# EAGLE board breakout (EAGLE 7.2.0)
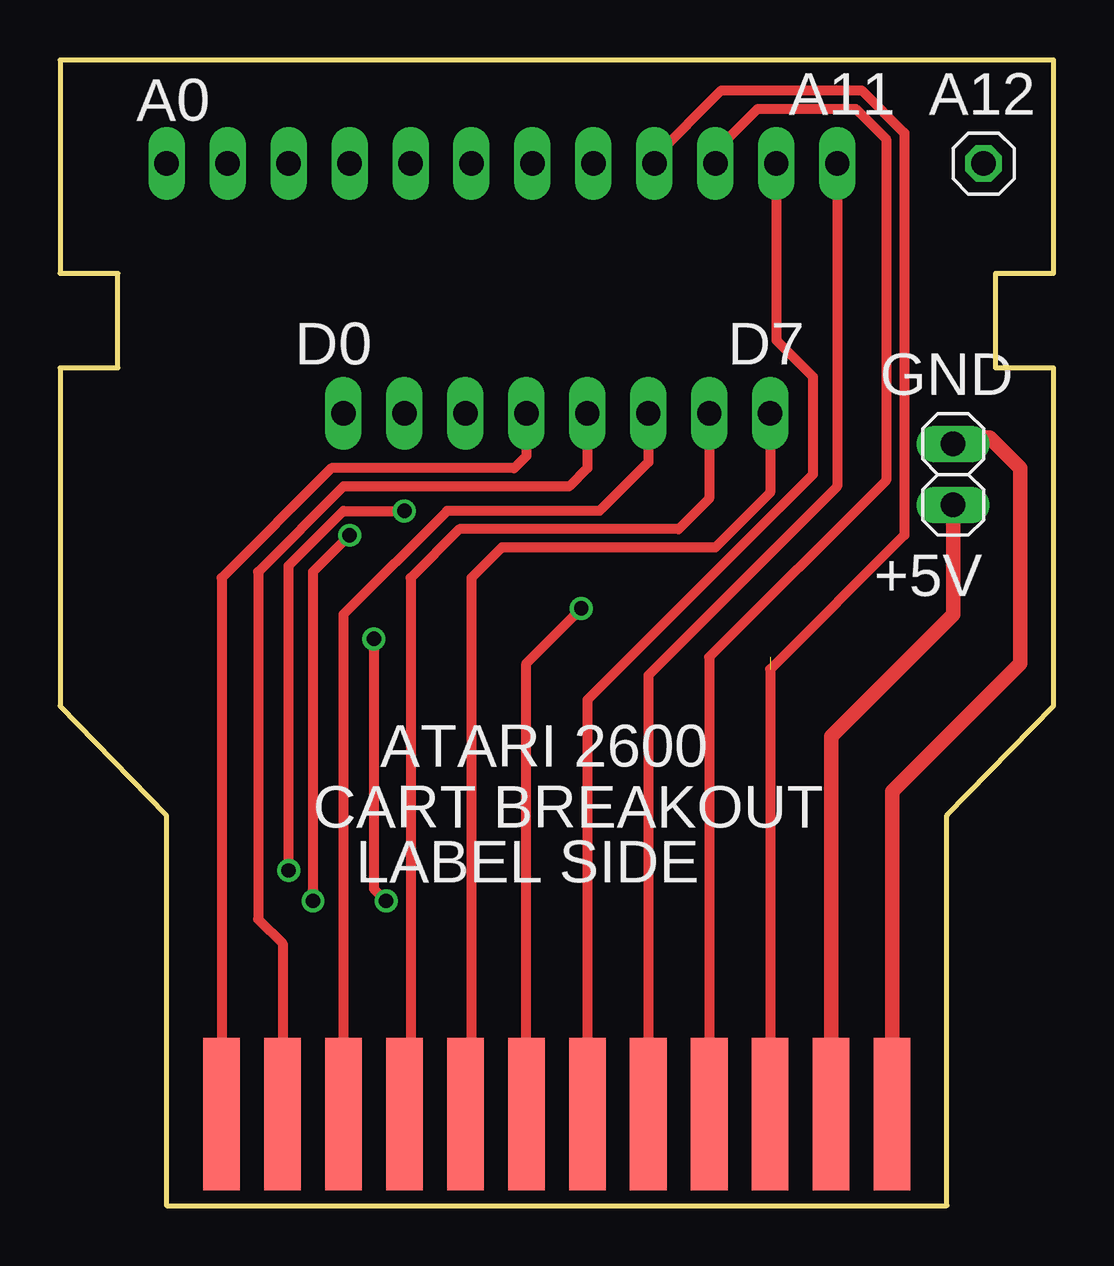
[diagram p0: board, top side]
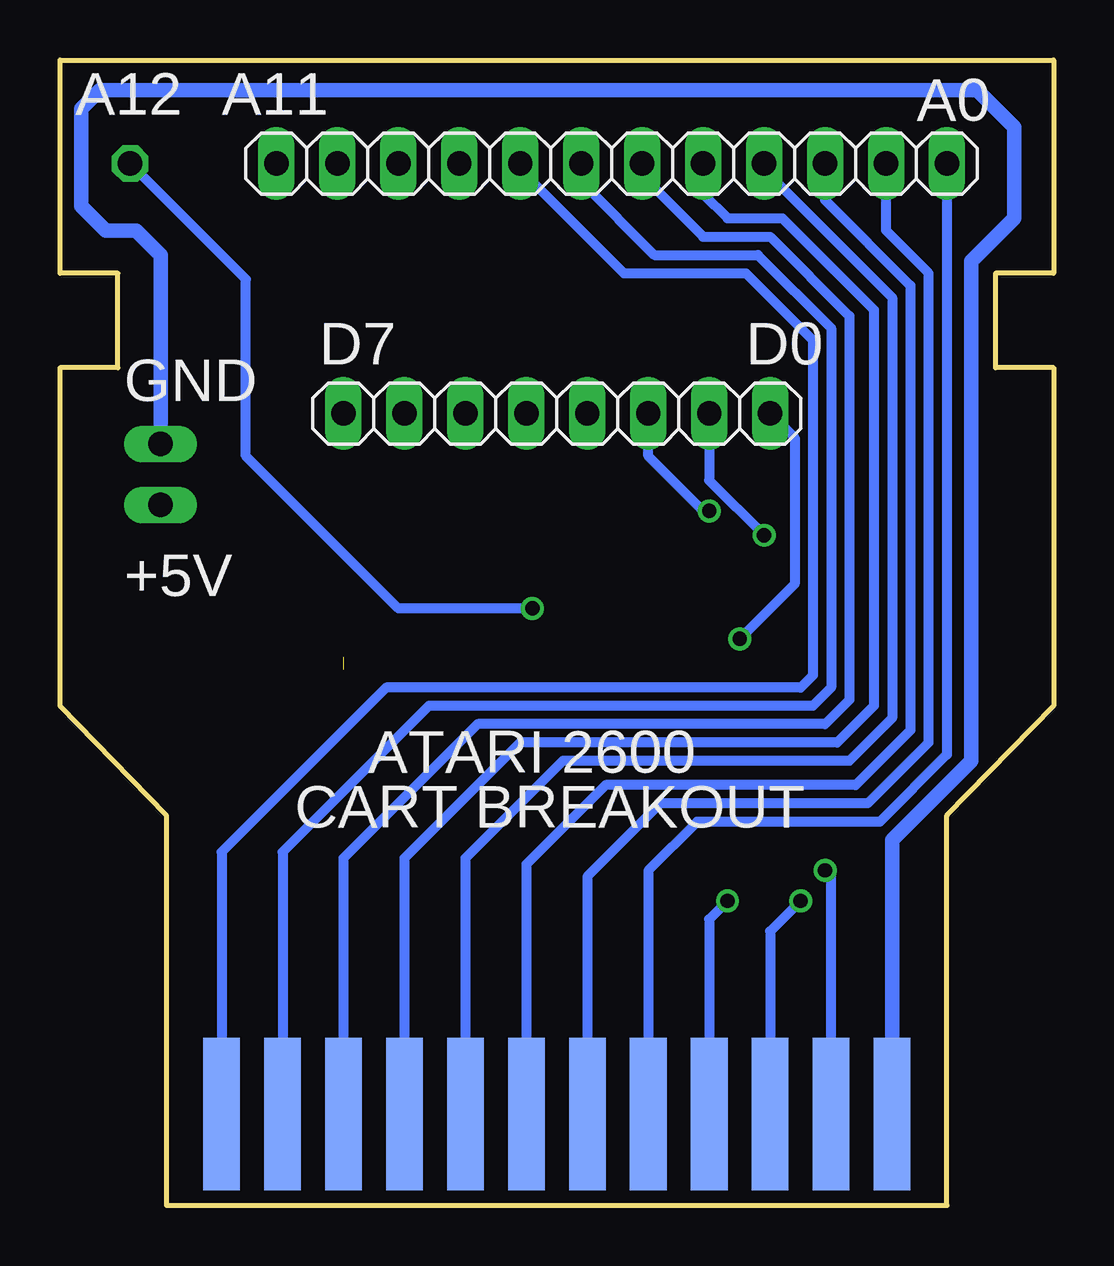
[diagram p1: board, bottom side, seen from below]

Size 41.4 x 47.75 mm. Coordinates in mm from the lower left corner, seen from the top.
Copper layers (1*16): Top 0.0356mm / dielectric 1.5011mm / Bottom 0.0356mm
Design rules "OSHPark2layer": minimum track width 6mil, minimum drill 13mil, track to track 6mil, track to pad 6mil, pad to pad 6mil, via to via 6mil, smd to smd 6mil, copper to edge 15mil, drill to drill 6mil, minimum pad ring 7mil, minimum via ring 7mil, stop-mask expansion 3mil, vias tented up to drill 0mil, thermal gap 10mil

## Footprints (pad centres in the part's own frame; a part is rotated, then mirrored left to right if it is on the bottom)
2600SMALL = smd 6.35 x 1.524: 1 3.81,13.97; 2 3.81,11.43; 3 3.81,8.89; 4 3.81,6.35; 5 3.81,3.81; 6 3.81,1.27; 7 3.81,-1.27; 8 3.81,-3.81; 9 3.81,-6.35; 10 3.81,-8.89; 11 3.81,-11.43; 12 3.81,-13.97 | smd 6.35 x 1.524 bottom: 13 3.81,-13.97; 14 3.81,-11.43; 15 3.81,-8.89; 16 3.81,-6.35; 17 3.81,-3.81; 18 3.81,-1.27; 19 3.81,1.27; 20 3.81,3.81; 21 3.81,6.35; 22 3.81,8.89; 23 3.81,11.43; 24 3.81,13.97
1X02 = drill 1.016 long: 1 -1.27,0; 2 1.27,0
1X08 = drill 1.016 long: 1 -8.89,0; 2 -6.35,0; 3 -3.81,0; 4 -1.27,0; 5 1.27,0; 6 3.81,0; 7 6.35,0; 8 8.89,0
1X12 = drill 1.016 long: 1 -13.97,0; 2 -11.43,0; 3 -8.89,0; 4 -6.35,0; 5 -3.81,0; 6 -1.27,0; 7 1.27,0; 8 3.81,0; 9 6.35,0; 10 8.89,0; 11 11.43,0; 12 13.97,0
1X01 = drill 1.016 octagon: 1 0,0

## Placement (x,y rotation side)
CONN1  24POSCESMALL  [2600SMALL]  20.7,0 90 top
JP1  [1X02]  37.21,30.48 90 top
JP2  [1X08]  20.7,33.02 180 bottom
JP3  [1X12]  18.42,43.43 180 bottom
JP4  [1X01]  38.48,43.43 0 top

## Library data of the parts
CONN1 = 2600
JP1-JP4 = pinhead

## Nets
5V: CONN1.11 JP1.1
A0: CONN1.20 JP3.1
A1: CONN1.19 JP3.2
A2: CONN1.18 JP3.3
A3: CONN1.17 JP3.4
A4: CONN1.16 JP3.5
A5: CONN1.15 JP3.6
A6: CONN1.14 JP3.7
A7: CONN1.13 JP3.8
A8: CONN1.10 JP3.9
A9: CONN1.9 JP3.10
A10: CONN1.7 JP3.11
A11: CONN1.8 JP3.12
A12: CONN1.6 JP4.1
D0: CONN1.21 JP2.1
D1: CONN1.22 JP2.2
D2: CONN1.23 JP2.3
D3: CONN1.1 JP2.4
D4: CONN1.2 JP2.5
D5: CONN1.3 JP2.6
D6: CONN1.4 JP2.7
D7: CONN1.5 JP2.8
GND: CONN1.12 CONN1.24 JP1.2

## Tracks (layer width: path | path; a pad name or v marks a point on that pad's centre or on a via)
5V
  Top 0.61: CONN1.11 32.13,19.56 37.21,24.64 JP1.1
A0
  Bottom 0.406: JP3.1 4.45,18.8 7.24,16 14.86,16 16.89,13.97 CONN1.20
A1
  Bottom 0.406: CONN1.19 19.43,13.72 16.38,16.76 7.75,16.76 5.21,19.3 5.21,38.86 6.99,40.64 JP3.2
A2
  Bottom 0.406: JP3.3 9.53,41.91 5.97,38.35 5.97,19.81 8.26,17.53 18.67,17.53 21.97,14.22 CONN1.18
A3
  Bottom 0.406: JP3.4 12.07,43.18 6.73,37.85 6.73,20.32 8.51,18.54 20.45,18.54 24.51,14.48 CONN1.17
A4
  Bottom 0.406: JP3.5 14.61,42.16 13.59,41.15 11.3,41.15 7.49,37.34 7.49,20.83 9.02,19.3 22.23,19.3 27.05,14.48 CONN1.16
A5
  Bottom 0.406: JP3.6 17.14,42.93 14.61,40.39 11.81,40.39 8.51,37.08 8.51,21.08 9.53,20.07 24,20.07 29.59,14.48 CONN1.15
A6
  Bottom 0.406: JP3.7 19.69,42.67 16.64,39.62 12.32,39.62 9.27,36.58 9.27,21.59 10.03,20.83 26.04,20.83 32.13,14.73 CONN1.14
A7
  Bottom 0.406: JP3.8 22.23,43.18 17.91,38.86 12.83,38.86 10.03,36.07 10.03,22.1 10.54,21.59 27.81,21.59 34.67,14.73 CONN1.13
A8  (1 unrouted)
  Top 0.406: CONN1.10 29.59,22.35 35.18,27.94 35.18,44.7 33.4,46.48 27.56,46.48 24.77,43.69 JP3.9
A9
  Top 0.406: CONN1.9 27.05,22.86 34.42,30.23 34.42,44.45 33.15,45.72 29.08,45.72 27.3,43.94 JP3.10
A10
  Top 0.406: JP3.11 29.84,36.07 31.37,34.54 31.37,30.48 21.97,21.08 CONN1.7 22.48,3.3
A11
  Top 0.406: CONN1.8 24.51,22.1 32.38,29.97 JP3.12
A12  (via drill 0.6)
  Top 0.406: CONN1.6 19.43,22.61 v21.72,24.89
  Bottom 0.406: v21.72,24.89 27.3,24.89 33.66,31.24 33.66,38.61 JP4.1
D0  (via drill 0.6)
  Top 0.406: v13.08,23.62 13.08,13.21 v13.59,12.7
  Bottom 0.406: v13.59,12.7 14.35,11.94 CONN1.21 | JP2.1 10.8,32 10.8,25.91 v13.08,23.62
D1  (via drill 0.6)
  Top 0.406: v12.07,27.94 10.54,26.42 v10.54,12.7
  Bottom 0.406: JP2.2 14.35,30.23 v12.07,27.94 | v10.54,12.7 11.81,11.43 CONN1.22
D2  (via drill 0.6)
  Top 0.406: v9.53,13.97 9.53,26.67 11.81,28.96 v14.35,28.96
  Bottom 0.406: CONN1.23 9.27,13.72 v9.53,13.97 | v14.35,28.96 14.61,28.96 16.89,31.24 JP2.3
D3
  Top 0.406: JP2.4 19.43,31.24 18.92,30.73 11.3,30.73 6.73,26.16 CONN1.1
D4
  Top 0.406: JP2.5 21.97,30.73 21.21,29.97 11.81,29.97 8.26,26.42 8.26,11.94 9.27,10.92 CONN1.2
D5
  Top 0.406: JP2.6 24.51,30.99 22.48,28.96 16.13,28.96 11.81,24.64 CONN1.3
D6
  Top 0.406: JP2.7 27.05,29.46 25.78,28.19 16.64,28.19 14.61,26.16 14.61,4.06 CONN1.4
D7
  Top 0.406: 16.89,3.3 CONN1.5 17.14,4.06 17.14,26.16 18.42,27.43 27.3,27.43 29.59,29.72 JP2.8
GND
  Top 0.61: CONN1.12 34.67,17.27 40.01,22.61 40.01,30.73 38.73,32 37.47,32 JP1.2
  Bottom 0.61: CONN1.24 6.73,15.24 3.43,18.54 3.43,39.37 1.65,41.15 1.65,44.96 3.18,46.48 39.75,46.48 40.51,45.72 40.51,41.66 39.5,40.64 38.23,40.64 37.21,39.62 JP1.2

## Text on the board
tNames: A11 | A12 | A0 | D0 | D7 | GND | +5V | ATARI 2600 | CART BREAKOUT | LABEL SIDE
bNames: A11 | A12 | A0 | D0 | D7 | GND | +5V | ATARI 2600 | CART BREAKOUT